# Altium PCB USB-serial converter.PcbDoc
Units mm, origin at the board's own origin, x right, y up, seen from the top; angles counter-clockwise.
Board outline 49.82 x 18.09 mm, 2 copper layers (Top Layer, Bottom Layer); 16 components, 16 nets, 72 pads, 0 vias.
Unrouted connection lines stored in the file: 1.
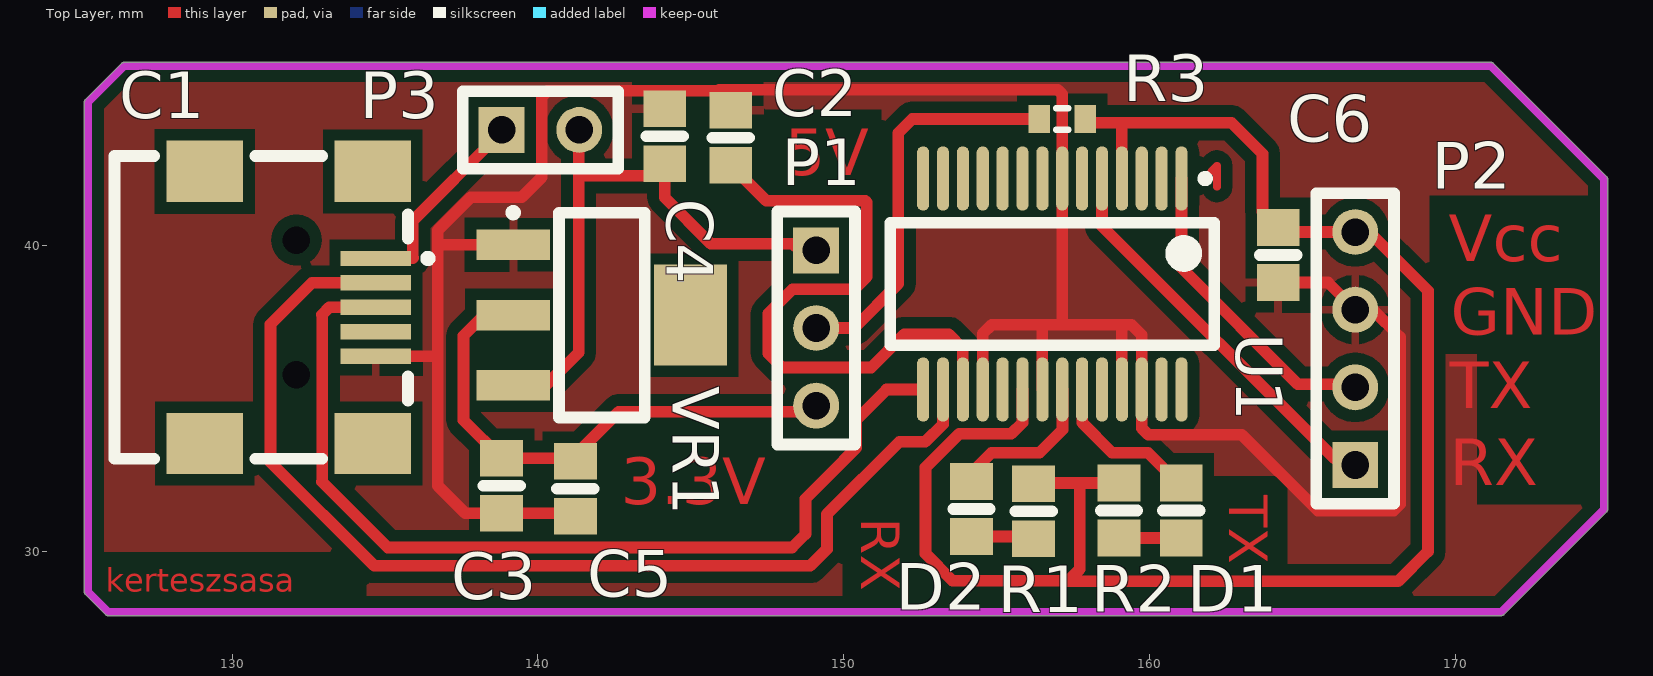
[diagram p0: Top Layer view]
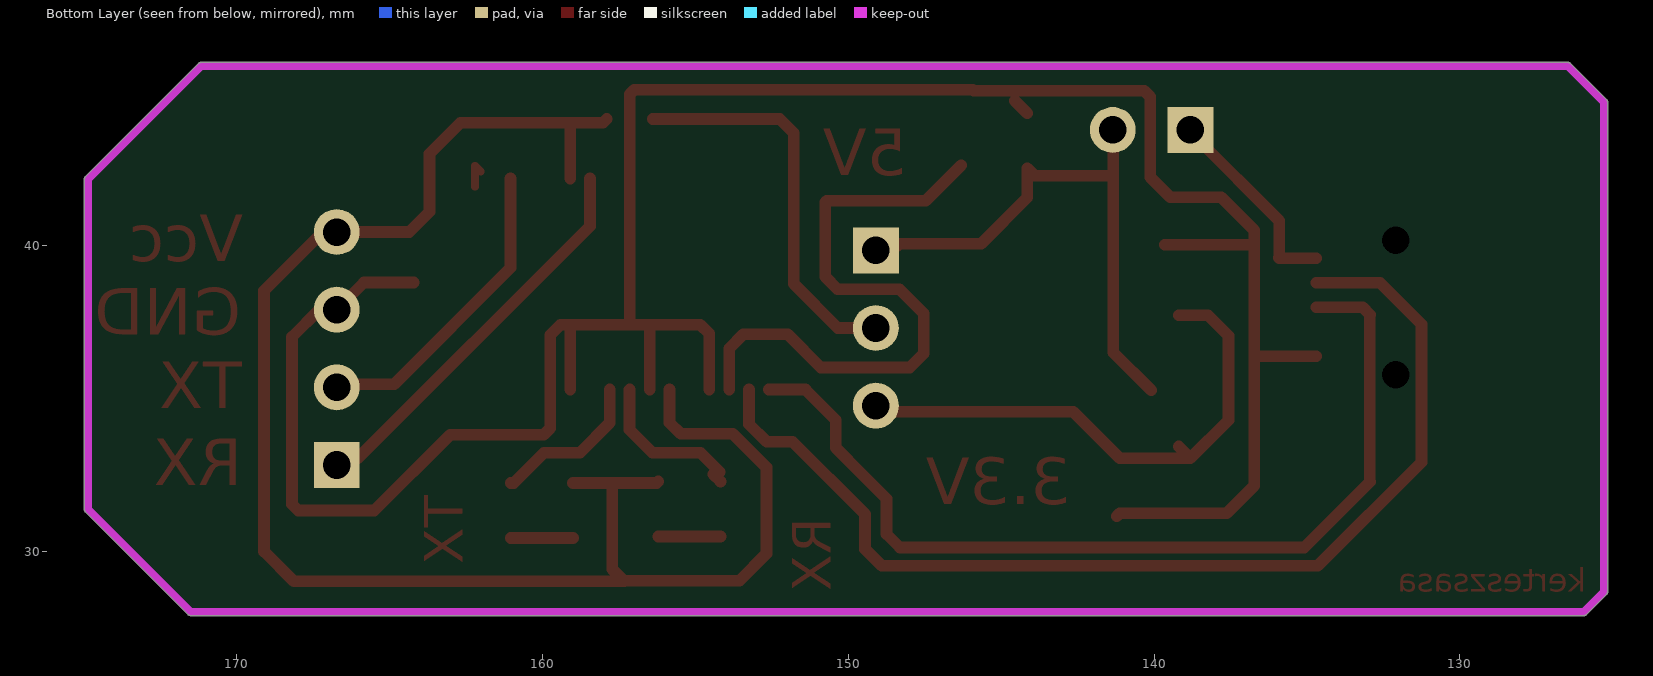
[diagram p1: Bottom Layer view, seen from below]

## Layer stack, top to bottom
Top Layer: signal copper 0.0356
Dielectric: dielectric 0.32, FR-4, Dk 4.8
Bottom Layer: signal copper 0.0356

## Board outline
125.203,28.594 125.853,27.944 ccw(c125.943,28.034) 125.943,27.907 171.506,27.907 ccw(c171.506,28.034) 171.596,27.944 174.946,31.294 ccw(c174.856,31.384) 174.984,31.384 174.984,42.179 ccw(c174.856,42.179) 174.946,42.27 174.946,42.269 171.253,45.962 ccw(c171.163,45.872) 171.163,46 126.469,46 ccw(c126.469,45.872) 126.379,45.962 125.203,44.786 125.203,44.787 ccw(c125.293,44.696) 125.166,44.696 125.166,28.684 ccw(c125.293,28.684)

## Design rules (kind name [scope] priority, off if disabled: settings)
Clearance "Clearance_to_gnd plane" [All vs (InNamedPolygon('GND_PLANE'))] p1: gap=0.381
Clearance [All] p2: gap=0.203
PolygonConnect [All] p1: connectstyle=Relief reliefconductorwidth=0.254 reliefentries=4 polygonreliefangle="90 Angle"
RoutingVias [All] p1: holewidth=0.711 width=1.27 viastyle="Through Hole" minholewidth=0.711 minwidth=1.27 maxholewidth=0.711 maxwidth=1.27
SilkscreenOverComponentPads [All] p1: minsilkscreentomaskgap=0.254
SolderMaskExpansion [All] p1: expansion=0.102
Width [All] p1: maxlimit=0.508 minlimit=0.203 preferedwidth=0.381
27 further rules are at their usual default settings.

## Components (designator, comment, footprint, x,y, rotation, side; value= is the part's Value field where it differs from the comment)
C1 "mini USB" USB/SM0.8-6H5 126.85,37.988 r180 top
C2 "Cap Semi" RESC2012N 146.304,43.536 r270 top
C3 "Cap Semi" RESC2012N 138.811,32.156 r90 top
C4 "Cap Semi" RESC2012N 144.145,43.586 r270 top
C5 "Cap Semi" RESC2012N 141.224,32.055 r90 top
C6 "Cap Semi" RESC2012N 164.211,39.7 r270 top
D1 "LED3" RESC2012N 161.036,31.344 r90 top
D2 "LED3" RESC2012N 154.178,31.394 r90 top
P1 "Jumper" HDR1X3 149.098,39.853 r270 top
P2 "Header 4" HDR1X4 166.728,32.832 r90 top
P3 "Header 2" HDR1X2 138.811,43.79 r0 top
R1 "Res2" RESC2012N 156.21,31.318 r270 top
R2 "Res2" RESC2012N 159.004,31.344 r270 top
R3 "Res2" RESC1608L 157.147,44.148 r180 top
U1 "IC_FT232RL" SSOP-28 156.822,38.75 r270 top
VR1 "Volt Reg 3V3" SOT223-4N 142.09,37.734 r0 top

## Footprints (in the part's own frame and the unit in brackets; to place one, negate y for a bottom-side part, rotate by r counter-clockwise, add the part's x,y. Pads: shape width x height; smd on the part's side, far side on the other; paste and mask are expansions set on the pad)
HDR1X2 [mm] "Connector; Header; 2 Position"
  rect 1.5x1.5 hole 0.9: 1(0,0)
  round 1.5 hole 0.9: 2(2.54,0)
  silkscreen extent -1.27,-1.27 3.81,1.27
HDR1X3 [mm] "Connector; Header; 3 Position"
  rect 1.5x1.5 hole 0.9: 1(0,0)
  round 1.5 hole 0.9: 2(2.54,0) 3(5.08,0)
  silkscreen extent -1.27,-1.27 6.35,1.27
HDR1X4 [mm] "Connector; Header; 4 Position"
  rect 1.5x1.5 hole 0.9: 1(0,0)
  round 1.5 hole 0.9: 2(2.54,0) 3(5.08,0) 4(7.62,0)
  silkscreen extent -1.27,-1.27 8.89,1.27
RESC1608L [mm] "Chip Resistor, Body 1.6x0.8mm, IPC High Density"
  rect 0.7x0.9 smd: 1(-0.75,0) 2(0.75,0)
  silkscreen extent -0.2,-0.35 0.2,0.35, body extent -0.85,-0.48 0.85,0.48, height 0.9
RESC2012N [mm] "Chip Resistor, Body 2.0x1.2mm, IPC Medium Density"
  rect 1.2x1.4 smd: 1(-0.9,0) 2(0.9,0)
  silkscreen extent 0,-0.6 0,0.6, body extent -1.07,-0.7 1.07,0.7, height 0.7
SOT223-4N [mm] "SOT223, 4-Leads, Body 6.5x3.5mm, Pitch 2.3mm, Lead Span 7mm, IPC Medium Density"
  rect 2.4x1 smd: 1(-2.9,2.3) 2(-2.9,0) 3(-2.9,-2.3)
  rect 2.4x3.3 smd: 4(2.9,0)
  silkscreen extent -3.02,-3.35 1.4,3.47, body extent -1.85,-3.35 1.85,3.35, height 1.7
SSOP-28 [mm] "28-Pin SSOP 0.65 mm Pitch"
  oval 2.1x0.4 smd: 1(-3.45,4.225) 2(-3.45,3.575) 3(-3.45,2.925) 4(-3.45,2.275) 5(-3.45,1.625) 6(-3.45,0.975) 7(-3.45,0.325) 8(-3.45,-0.325) 9(-3.45,-0.975) 10(-3.45,-1.625) 11(-3.45,-2.275) 12(-3.45,-2.925) 13(-3.45,-3.575) 14(-3.45,-4.225) 15(3.45,-4.225) 16(3.45,-3.575) 17(3.45,-2.925) 18(3.45,-2.275) 19(3.45,-1.625) 20(3.45,-0.975) 21(3.45,-0.325) 22(3.45,0.325) 23(3.45,0.975) 24(3.45,1.625) 25(3.45,2.275) 26(3.45,2.925) 27(3.45,3.575) 28(3.45,4.225)
  silkscreen extent -3.57,-5.3 2,5.3, body extent -2.7,-5.3 2.7,5.3, height 2
USB/SM0.8-6H5 [mm] "Connector; USB2.0, Type B, SM; 5 Position; Right Angle"
  rect 2.3x0.5 smd: 1(-7.85,-1.6) 2(-7.85,-0.8) 3(-7.85,0) 4(-7.85,0.8) 5(-7.85,1.6)
  rect 2.5x2 smd: 6(-7.75,4.45) 7(-2.25,4.45) 8(-7.75,-4.45) 9(-2.25,-4.45)
  round 0.6 hole 0.9 unplated: MH1(-5.25,2.2) MH2(-5.25,-2.2)
  silkscreen extent -9.68,-4.95 0.7,4.95, body extent -8.9,-4.95 0.7,4.95, height 3.9

## Part data
C2 C3 C4 C5 C6: "Capacitor (Semiconductor SIM Model)"
D1 D2: "Typical BLUE SiC LED"
P1: library part "Header 3", "Header, 3-Pin"
P2: "Header, 4-Pin"
P3: "Header, 2-Pin"
R1 R2 R3: "Resistor"
U1: "FT232R USB UART"
VR1: library part "Volt Reg", "Voltage Regulator"

## Nets (pads, with @x,y where several pads share a name; then routed paths per layer and width w, separated by ;. In a path a pad name is that pad's centre, name@x,y a point inside that pad or via, vN(x,y) a via of type N, cw(c..) or ccw(c..) an arc to the next point about the centre after c; other vN are vias at no path point)
GND: C1.5 C2.1 C3.1 C4.1 C5.1 C6.2 P2.3 U1.7 U1.18 U1.21 U1.25 U1.26 VR1.1 | length 84.8
  Top Layer w0.381: C1.5 136.673,36.388 136.718,36.434 ; VR1.1@139.651,40.034 VR1.1 136.747,40.034 136.718,40.063 ; C5.1 141.122,31.256 C3.1 137.621,31.256 136.718,32.159 136.718,36.434 ; C4.1@144.145,44.334 C4.1@144.556,44.745 ; U1.18 154.547,37.133 154.838,37.424 156.479,37.424 ; U1.21 156.497,37.406 156.479,37.424 ; 159.075,37.424 157.104,37.424 ; U1.25 159.097,37.402 159.078,37.422 159.41,37.422 159.747,37.085 U1.26 159.747,34.032 159.958,33.822 163.023,33.822 165.501,31.344 167.985,31.344 168.194,31.552 168.194,37.018 167.3,37.912 P2.3 165.84,38.8 C6.2 ; 136.718,36.434 136.718,40.063 ; 136.718,40.063 136.718,40.51 137.8,41.593 139.469,41.593 140.124,42.248 140.124,44.877 140.325,45.077 145.898,45.077 145.926,45.105 157.005,45.105 157.147,44.963 U1.7 157.147,37.467 157.104,37.424 ; 156.479,37.424 157.104,37.424
NC: U1.8 U1.24
NetC1_1: C1.1 P3.1 | length 6.3
  Top Layer w0.381: C1.1 135.905,39.588 ; 135.905,40.82 135.905,39.588 ; 135.923,39.606 135.905,39.588 ; 135.923,40.838 P3.1@138.661,43.576
NetC1_2: C1.2 U1.16 | length 35.6
  Top Layer w0.381: C1.2 132.608,38.788 131.255,37.435 131.255,32.926 134.64,29.54 148.91,29.54 149.451,30.081 149.451,31.219 151.826,33.594 152.672,33.594 153.247,34.169 U1.16
NetC1_3: C1.3 U1.15 | length 31.2
  Top Layer w0.381: 132.936,32.283 135.087,30.132 148.308,30.132 148.75,30.574 148.75,31.73 149.984,32.964 149.984,32.972 150.406,33.393 150.406,34.305 151.401,35.3 U1.15 ; 132.944,32.317 132.944,37.738 132.936,37.746 133.179,37.988 C1.3
NetC2_2: C2.2 U1.17 | length 21
  Top Layer w0.381: C2.2 147.464,41.476 150.708,41.476 150.757,41.427 150.757,38.984 150.353,38.58 148.326,38.58 147.533,37.788 147.533,36.479 147.993,36.02 150.896,36.02 151.981,37.104 153.436,37.104 153.897,36.644 U1.17
NetC3_2: C3.2 C5.2 P1.3 VR1.2 | length 18
  Top Layer w0.381: C3.2@139.19,33.436 C3.2 ; VR1.2 138.237,37.734 137.566,37.064 137.566,34.301 C3.2 ; P1.3 148.902,34.577 142.643,34.577 141.122,33.056 C3.2
NetC4_2: C4.2 P1.1 P3.2 VR1.3 | length 18.4
  Top Layer w0.381: VR1.3@140.096,35.276 141.331,36.51 141.331,43.447 P3.2@141.201,43.576 ; 141.331,42.288 143.899,42.288 144.145,42.534 144.145,41.58 145.651,40.074 148.336,40.074 148.557,39.853 P1.1
NetC6_1: C6.1 P2.4 R1.1 R2.1 R3.1 U1.4 U1.20 | length 56.1
  Top Layer w0.381: U1.20 155.847,34.219 155.484,33.857 153.775,33.857 152.677,32.758 152.677,29.924 153.558,29.042 157.356,29.042 ; R1.1@156.21,32.294 156.261,32.244 157.721,32.244 ; R3.1 158.022,44.023 159.149,44.023 159.146,44.026 159.563,44.026 159.565,44.023 162.682,44.023 163.698,43.007 163.698,41.113 C6.1 164.359,40.452 P2.4 167.185,40.452 169.111,38.527 169.111,30.005 168.13,29.025 157.323,29.025 157.721,29.423 157.721,32.244 ; R2.1 157.721,32.244 ; U1.4 159.097,43.972
NetD1_1: D1.1 R2.2 | length 2
  Top Layer w0.381: R2.2 D1.1
NetD1_2: D1.2 U1.23 | length 5.1
  Top Layer w0.381: U1.23 157.797,34.214 158.774,33.237 159.953,33.237 160.946,32.244 D1.2
NetD2_1: D2.1 R1.2 | length 2
  Top Layer w0.381: D2.1 155.006,30.494 155.202,30.494 R1.2@156.21,30.494
NetD2_2: D2.2 U1.22 | length 5.2
  Top Layer w0.381: D2.2 D2.2@154.412,32.528 ; D2.2@154.198,32.603 154.832,33.237 156.402,33.237 157.155,33.99 157.155,35.293 U1.22
NetP1_2: P1.2 R3.2 | length 13
  Top Layer w0.381: P1.2 150.34,37.313 151.785,38.758 151.785,43.691 152.243,44.148 R3.2
NetP2_1: P2.1 U1.5 | length 13.1
  Top Layer w0.381: U1.5 158.447,40.646 166.058,33.035 166.525,33.035 P2.1
NetP2_2: P2.2 U1.1 | length 10.2
  Top Layer w0.381: U1.1 161.047,39.278 164.849,35.476 166.624,35.476 P2.2
pads on no net: C1.4 C1.6 C1.7 C1.8 C1.9 C1.MH1 C1.MH2 U1.2 U1.3 U1.6 U1.9 U1.10 U1.11 U1.12 U1.13 U1.14 U1.19 U1.27 U1.28 VR1.4
copper on no net: | length 1
  Top Layer w0.254: 162.016,42.431 162.204,42.619 162.204,41.933

## Polygon pours and split planes (outlines as drawn)
GND on Top Layer "GND_PLANE" (solid, pour order 1000): 125.232,28.623 125.847,28.009 125.933,28.009 125.976,27.965 171.432,27.965 174.851,31.384 174.851,42.167 171.254,45.763 171.214,45.763 171.168,45.763 171.125,45.806 171.039,45.893 126.591,45.893 125.364,44.666 125.275,44.666

## Keep-outs
Keep-Out Layer:
  lines w0.254: 125.293,28.684 125.293,44.696 126.469,45.872 171.163,45.872 174.856,42.179 174.856,31.384 171.506,28.034 125.943,28.034 125.293,28.684

## Other copper
Top Layer:
  text "5V" at 148.072,42.301 h1.52
  text "Vcc" at 169.784,39.5 h1.52
  text "GND" at 169.847,37.087 h1.52
  text "TX" at 169.819,34.689 h1.52
  text "RX" at 169.817,32.167 h1.52
  text "TX" at 162.613,31.849 h1.27 r270
  text "3.3V" at 142.702,31.552 h1.52
  text "RX" at 150.579,31.115 h1.27 r270
  text "kerteszsasa" at 125.865,28.692 h0.76

## Text inside footprints (layer, text, board x,y; h text height)
C1: Mechanical 1 "PCB Edge" at 126.418,42.025 h0.25 r270